# Altium PCB PCB1.PcbDoc
Units mm, origin at the board's own origin, x right, y up, seen from the top; angles counter-clockwise.
Board outline 50 x 25 mm, 2 copper layers (Top Layer, Bottom Layer); 18 components, 15 nets, 57 pads, 8 vias.
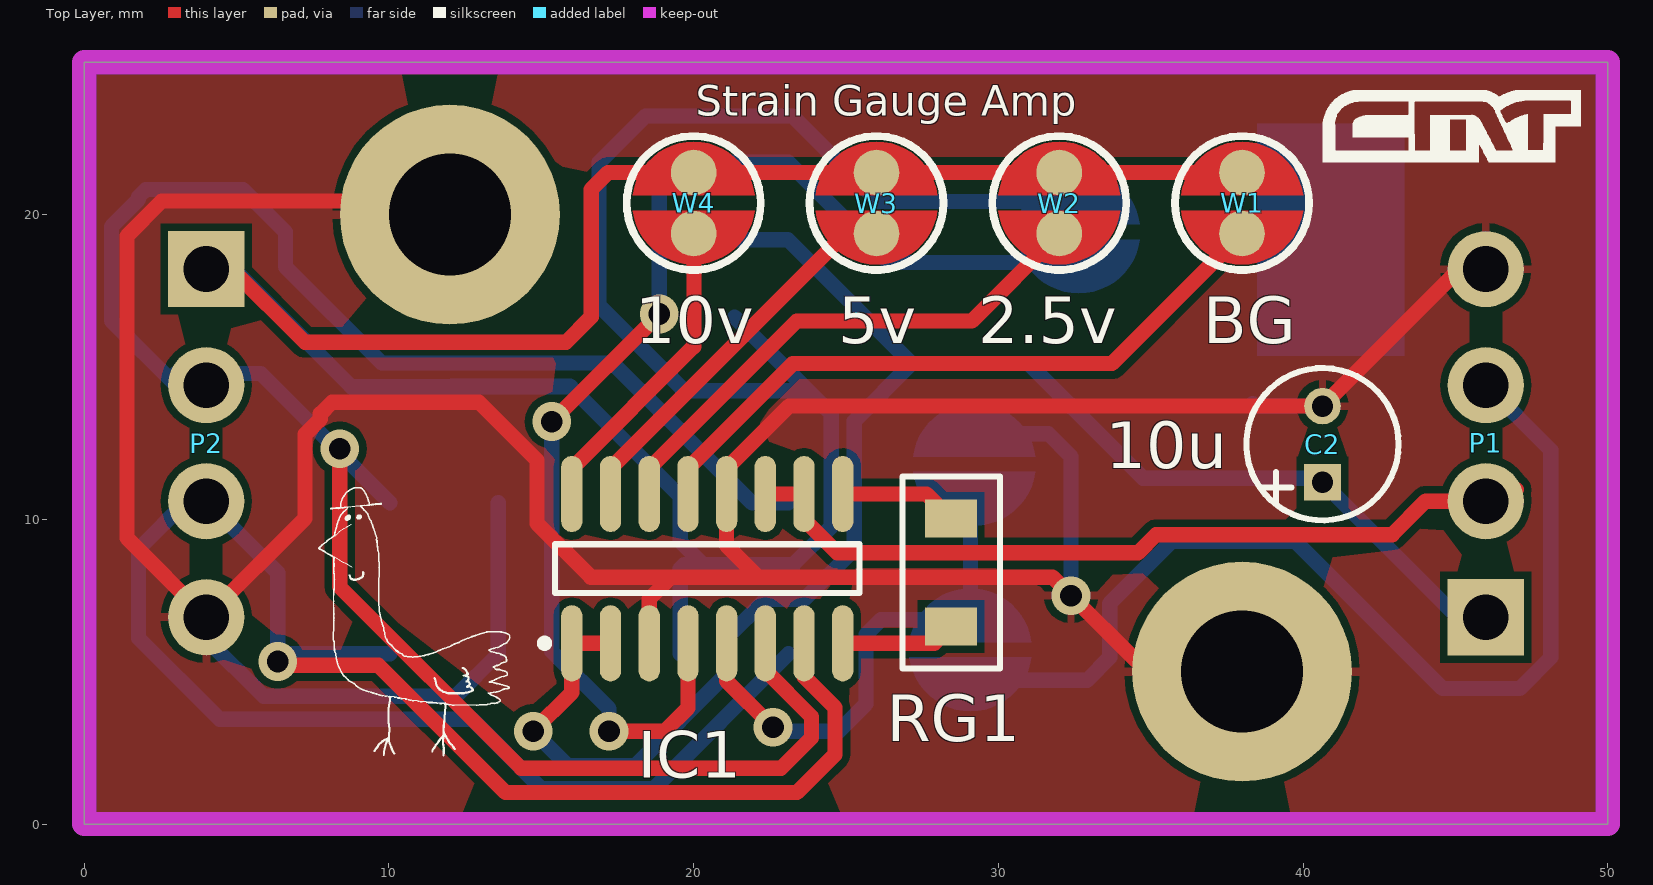
[diagram p0: Top Layer view]
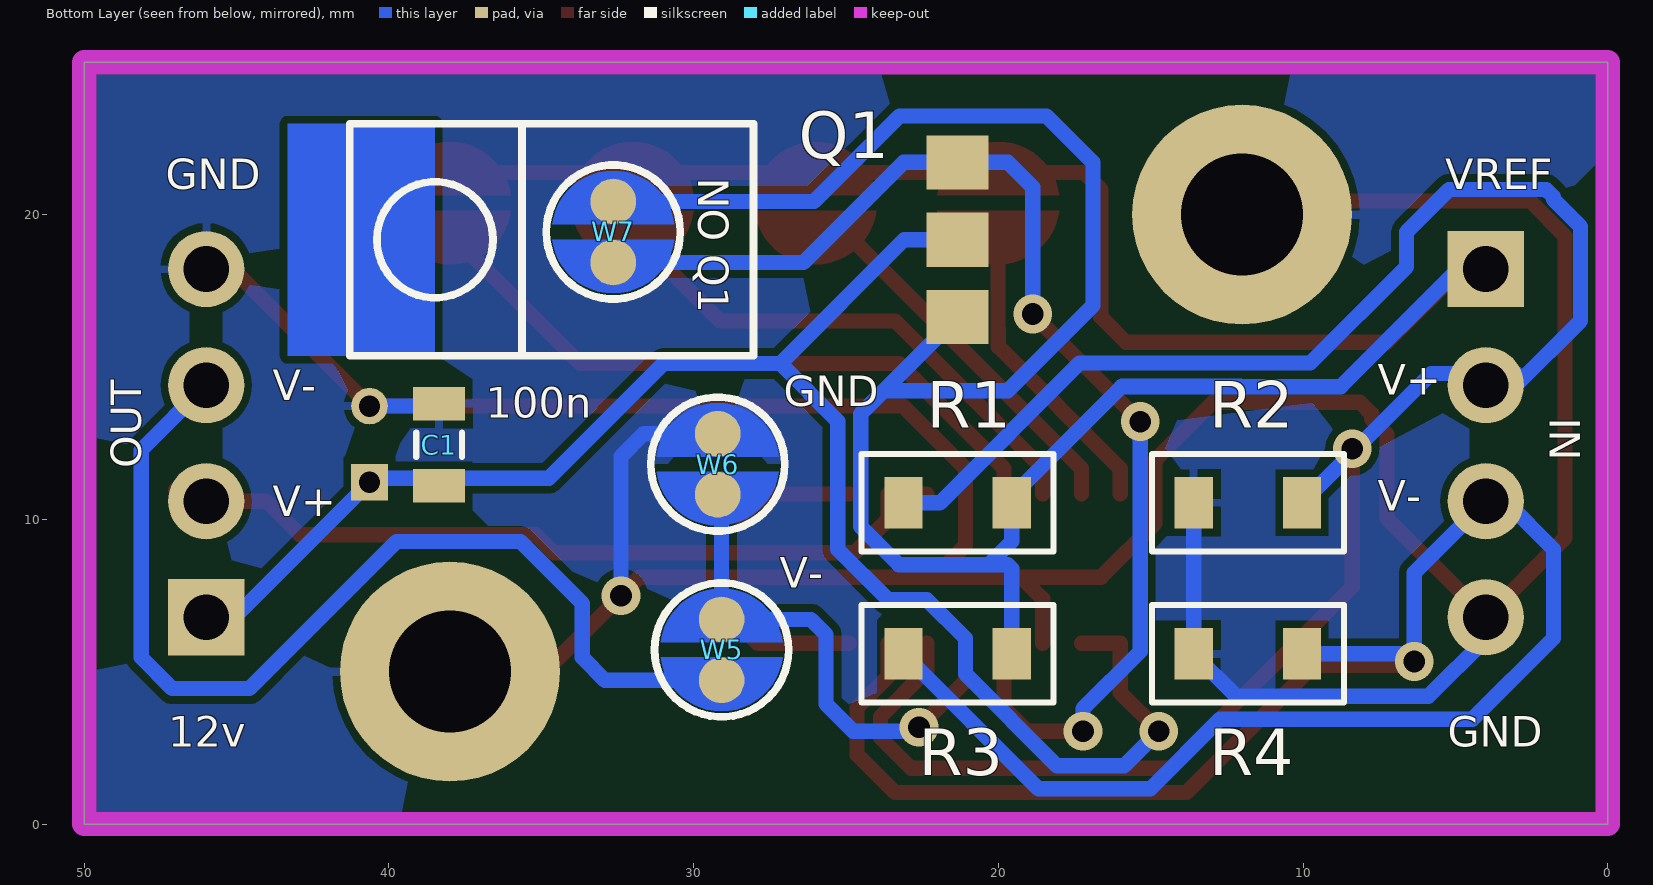
[diagram p1: Bottom Layer view, seen from below]

## Layer stack, top to bottom
Top Solder: solder mask 0.0102, Solder Resist, Dk 3.5
Top Layer: signal copper 0.0356
Dielectric 1: dielectric 0.32, FR-4, Dk 4.8
Bottom Layer: signal copper 0.0356
Bottom Solder: solder mask 0.0102, Solder Resist, Dk 3.5

## Board outline
0,0 0,25 50,25 50,0

## Design rules (kind name [scope] priority, off if disabled: settings)
Clearance "KO Layer" [OnLayer('Keep-Out Layer')] p1: gap=0
Clearance [All] p2: gap=0.254
HoleSize [All] p1: absolutevalues=TRUE maxlimit=1000 minlimit=0.025 maxpercent=80.000 minpercent=20.000
PolygonConnect [All] p1: connectstyle=Relief reliefconductorwidth=0.254 reliefentries=4 polygonreliefangle="90 Angle" airgapwidth=0.254
RoutingVias [All] p1: holewidth=0.711 width=1.27 viastyle="Through Hole" minholewidth=0.711 minwidth=1.27 maxholewidth=0.711 maxwidth=1.27
SolderMaskExpansion [All] p1: expansion=0.102
Width "Silkscreen Width" [(OnLayer('Bottom Overlay') OR OnLayer('Top Overlay'))] p1: maxlimit=1000 minlimit=0.152 preferedwidth=0.254 checkconnectedcopper=TRUE
Width "Min Width" [All] p2: maxlimit=100 minlimit=0.5 preferedwidth=0.5
Width [All] p3: maxlimit=0.254 minlimit=0.254 preferedwidth=0.254
29 further rules are at their usual default settings.

## Components (designator, comment, footprint, x,y, rotation, side; value= is the part's Value field where it differs from the comment)
C1 "100n" C1206 38.354,12.446 r90 bottom
C2 "10u" "Cap 2.5mm" 40.64,13.716 r270 top
IC1 "INA125U" SOIC16_M 20.447,8.382 r90 top
P1 "Output/Power" "Dinkle Mini 4P - NO SILK" 46,12.5 r180 top
P2 "Input/Reference" "Dinkle Mini 4P - NO SILK" 4,12.5 r0 top
Q1 "NPN" "TO220 SMD BENT" 21.336,19.177 r180 bottom
R1 "Res1" R1206 21.336,10.541 r180 bottom
R2 "Res1" R1206 11.811,10.541 r180 bottom
R3 "Res1" R1206 21.336,5.588 r180 bottom
R4 "Res1" R1206 11.811,5.588 r180 bottom
RG1 "Res1" R1206 28.448,8.255 r270 top
W1 "BG" "SMD JUMPER" 38,20.381 r180 top
W2 "2.5v" "SMD JUMPER" 32,20.381 r180 top
W3 "5v" "SMD JUMPER" 26,20.381 r180 top
W4 "10v" "SMD JUMPER" 20,20.381 r180 top
W5 "V-" "SMD JUMPER" 29.083,5.715 r180 bottom
W6 "GND" "SMD JUMPER" 29.21,11.811 r0 bottom
W7 "NO Q1" "SMD Jumper" 32.639,19.431 r180 bottom

## Footprints (in the part's own frame and the unit in brackets; to place one, negate y for a bottom-side part, rotate by r counter-clockwise, add the part's x,y. Pads: shape width x height; smd on the part's side, far side on the other; paste and mask are expansions set on the pad)
C1206 [mm] "Chip Capacitor, Body 3.2x1.6mm, IPC High Density"
  rect 1.1x1.7 smd: 1(-1.35,0) 2(1.35,0)
  silkscreen extent -0.4,-0.75 0.4,0.75, body extent -1.7,-0.9 1.7,0.9, height 1.3
"Cap 2.5mm" [mm]
  rect 1.2x1.2 hole 0.7: 1(2.5,0)
  round 1.2 hole 0.7: 2(0,0)
  silkscreen extent -1.25,-2.5 3.75,2.5, body extent -1.24,-2.49 3.74,2.5, height 8
"Dinkle Mini 4P - NO SILK" [mm]
  rect 2.5x2.5 hole 1.5: 1(0,5.715)
  round 2.5 hole 1.5: 2(0,1.905) 3(0,-1.905) 4(0,-5.715)
  body extent -6.35,-8.2 2.6,8.25, height 7
R1206 [mm]
  rect 1.25x1.7 smd: 1(-1.775,0) 2(1.775,0)
  silkscreen extent -3.15,-1.6 3.15,1.6, body extent -1.91,-0.89 1.91,0.89, height 1
"SMD JUMPER" [mm]
  round 1.5 smd paste+0 mask+0: 1(0,1) 2(0,-1)
  Top Layer region: -2,0.25 -1.656,1.149 -0.935,1.786 0,2.016 0.935,1.786 1.656,1.149 2,0.25 2,0.25
  Top Layer region: 2,-0.25 1.656,-1.149 0.935,-1.786 0,-2.016 -0.935,-1.786 -1.656,-1.149 -2,-0.25 -2,-0.25
  silkscreen extent -2.2,-2.2 2.2,2.2
"SMD Jumper" [mm]
  round 1.5 smd paste+0 mask+0: 1(0,1) 2(0,-1)
  Top Layer region: 2,-0.25 1.656,-1.149 0.935,-1.786 0,-2.016 -0.935,-1.786 -1.656,-1.149 -2,-0.25 -2,-0.25
  Top Layer region: -2,0.25 -1.656,1.149 -0.935,1.786 0,2.016 0.935,1.786 1.656,1.149 2,0.25 2,0.25
  silkscreen extent -2.2,-2.2 2.2,2.2
SOIC16_M [mm] "SOIC, 16-Leads, Body 9.9x3.9mm, Pitch 1.27mm, IPC Low Density"
  oval 2.5x0.7 smd: 1(-2.45,4.445) 2(-2.45,3.175) 3(-2.45,1.905) 4(-2.45,0.635) 5(-2.45,-0.635) 6(-2.45,-1.905) 7(-2.45,-3.175) 8(-2.45,-4.445) 9(2.45,-4.445) 10(2.45,-3.175) 11(2.45,-1.905) 12(2.45,-0.635) 13(2.45,0.635) 14(2.45,1.905) 15(2.45,3.175) 16(2.45,4.445)
  silkscreen extent -2.57,-5 0.8,5.47, body extent -2,-5 2,5, height 1.91
"TO220 SMD BENT" [mil]
  rect 80x70 smd: 1(0,-100) 2(0,0) 3(0,100)
  Top Layer region: -675.43,-150 -866.14,-150 -866.14,150 -675.43,150
  silkscreen extent -785,-150 -264,150, body extent -783,-150 -264,150, height 177

## Part data
C1 C2: library part CAP_1, "Capacitor"
IC1: "<b>Instrumentation Amplifier</b><p> / with Precision Voltage Reference"
P1 P2: library part "Header 4", "Header, 4-Pin"
Q1: "NPN Bipolar Transistor"
R1 R2 R3 R4 RG1: "Resistor"
W1 W2 W3 W4 W5 W6 W7: library part Jumper, "Jumper Wire"

## Free pads (board coordinates)
  round 7.22 hole 4 mask+0: ""(12,20) ""(38,5)

## Via types
v1: diameter 1.27, hole 0.711, Top Layer to Bottom Layer, 8 vias

## Nets (pads, with @x,y where several pads share a name; then routed paths per layer and width w, separated by ;. In a path a pad name is that pad's centre, name@x,y a point inside that pad or via, vN(x,y) a via of type N, cw(c..) or ccw(c..) an arc to the next point about the centre after c; other vN are vias at no path point)
12V: C1.1 C2.1 IC1.1 IC1.2 P1.1 Q1.2 | length 57
  Top Layer w0.5: v1(14.732,3.048) 16.002,4.318 IC1.1 IC1.2
  Bottom Layer w0.5: v1(14.732,3.048) 15.871,1.909 18.07,1.909 21.082,4.921 21.082,6.096 22.352,7.366 23.622,7.366 25.273,9.017 25.273,13.232 27.154,15.113 ; Q1.2 23.09,19.177 27.154,15.113 ; P1.1@47,6.785 P1.1 45.071,6.785 C2.1 40.506,11.35 34.751,11.35 30.988,15.113 27.154,15.113
GND: C1.2 C2.2 IC1.3 IC1.12 P1.4 P2.4 pad. R2.1 R4.1 W6.2 | length 128.3
  Top Layer w0.5: pad.@12,20 11.553,20.447 2.54,20.447 1.397,19.304 1.397,9.388 P2.4 7.243,10.028 7.243,12.791 7.747,13.295 7.747,13.462 8.128,13.843 12.954,13.843 14.859,11.938 14.859,9.867 16.624,8.103 19.253,8.103 ; IC1.3 18.542,7.391 19.253,8.103 ; 22.098,8.128 21.082,9.144 IC1.12 21.082,11.67 23.128,13.716 C2.2 45.139,18.215 P1.4 ; pad.@37,5.381 34.497,5.381 v1(32.385,7.493) 31.775,8.103 19.253,8.103
  Bottom Layer w0.5: P2.4 4,6.073 5.878,4.195 12.193,4.195 R4.1 R2.1 ; W6.2 31.639,12.811 32.385,12.065 v1(32.385,7.493) ; C1.2 38.434,13.716 C2.2
NetIC1_4: IC1.4 Q1.3 W7.2 | length 40.7
  Top Layer w0.5: v1(15.342,13.208) v1(18.872,16.739) ; v1(17.221,3.048) 19.05,3.048 19.812,3.81 IC1.4
  Bottom Layer w0.5: v1(15.342,13.208) 15.342,5.664 17.221,3.785 v1(17.221,3.048) ; v1@18.974,16.637 v1(18.872,16.739) 18.872,20.904 19.685,21.717 23.114,21.717 26.4,18.431 W7.2
NetIC1_5: IC1.5 W5.1 W6.1 | length 16.7
  Top Layer w0.5: IC1.5 21.082,4.699 v1(22.606,3.175)
  Bottom Layer w0.5: v1(22.606,3.175) 22.733,3.048 24.765,3.048 25.654,3.937 25.654,6.223 26.146,6.715 W5.1 W6.1@29.083,10.668
NetIC1_8: IC1.8 RG1.2 | length 3.8
  Top Layer w0.5: IC1.8 27.9,5.932 RG1.2
NetIC1_9: IC1.9 RG1.1 | length 3.9
  Top Layer w0.5: IC1.9 27.646,10.832 RG1.1
NetIC1_13: IC1.13 W1.1 | length 22.2
  Top Layer w0.5: IC1.13 19.812,11.67 23.255,15.113 33.732,15.113 W1.1
NetIC1_14: IC1.14 W2.1 | length 17.5
  Top Layer w0.5: IC1.14 18.542,11.67 23.382,16.51 29.129,16.51 W2.1
NetIC1_15: IC1.15 W3.1 | length 11.7
  Top Layer w0.5: IC1.15 17.272,11.67 24.983,19.381
NetIC1_16: IC1.16 W4.1 | length 10.2
  Top Layer w0.5: IC1.16 16.002,11.67 20,15.668 20,16.256 20.011,16.267 20.011,19.37 W4.1
VIN+: IC1.6 P2.2 R1.1 R2.2 | length 69.2
  Top Layer w0.5: v1(8.382,12.319) 8.382,7.787 14.34,1.829 22.871,1.829 23.872,2.83 23.872,3.52 22.352,5.04 IC1.6
  Bottom Layer w0.5: P2.2@3,14.405 0.889,16.516 0.889,19.612 1.778,20.501 1.778,20.587 2.019,20.828 5.207,20.828 6.604,19.431 6.604,18.288 9.762,15.13 17.331,15.13 21.921,10.541 R1.1 ; P2.2@3,14.786 5.791,14.786 R2.2
VIN-: IC1.7 P2.3 R3.1 R4.2 | length 65.3
  Top Layer w0.5: v1(6.35,5.334) 6.477,5.207 9.652,5.207 13.827,1.032 23.394,1.032 24.638,2.276 24.638,3.82 23.622,4.836 IC1.7
  Bottom Layer w0.5: v1(6.35,5.334) 6.35,8.245 P2.3 3.356,10.595 1.778,9.017 1.778,6.096 4.433,3.441 12.728,3.441 15.014,1.155 18.678,1.155 R3.1 ; v1@6.604,5.588 R4.2
VOUT+: IC1.10 IC1.11 P1.2 | length 26.9
  Top Layer w0.5: IC1.11 IC1.10 23.622,9.994 24.715,8.901 34.585,8.901 35.179,9.495 42.926,9.495 44.026,10.595 P1.2@47,10.595 ; P1.2@46.81,10.786 P1.2@47,10.976
VOUT-: P1.3 W5.2 | length 34.2
  Bottom Layer w0.5: W5.2 32.909,4.715 33.655,5.461 33.655,7.239 35.687,9.271 39.751,9.271 44.577,4.445 47.117,4.445 48.133,5.461 48.133,12.272 P1.3
VREF: P2.1 Q1.1 R1.2 R3.2 W1.2 W2.2 W3.2 W4.2 W7.1 | length 113.7
  Top Layer w0.5: P2.1@3,18.215 4.835,18.215 7.239,15.811 15.811,15.811 16.637,16.637 16.637,20.828 17.19,21.381 W4.2 W3.2 W2.2 W1.2
  Bottom Layer w0.5: P2.1@3,18.215 4.899,18.215 8.763,14.351 15.964,14.351 ; 12.065,14.376 15.939,14.376 15.964,14.351 ; R3.2 19.561,8.382 19.688,8.509 20.32,8.509 ; Q1.1 23.749,14.224 ; W7.1 26.051,20.431 23.241,23.241 18.415,23.241 16.891,21.717 16.891,17.018 19.685,14.224 23.749,14.224 ; 15.964,14.351 19.561,10.754 R1.2 19.561,9.268 20.32,8.509 ; 20.32,8.509 23.267,8.509 24.519,9.761 24.519,13.454 23.749,14.224

## Polygon pours and split planes (outlines as drawn)
GND on Bottom Layer "Top Layer-No Net" (solid, remove dead copper, pour order 4): 0,0 0,25 50,25 50,0
GND on Top Layer "Top Layer-No Net" (solid, remove dead copper, pour order 2): -0.254,0 0,0.254 0,25 50,25 50,0

## Keep-outs
Keep-Out Layer:
  the board outline again, w0.8

## Silkscreen, mask and mechanical layers (free items; w line width, h text height)
Top Overlay:
  drawing of 6 lines, arcs and shapes, not listed
  text "Strain Gauge Amp" at 20.066,23.241 h1
Bottom Overlay:
  text "VREF" at 5.333,20.828 h1
  text "GND" at 47.333,20.828 h1
  text "V+" at 7.549,14.097 h1
  text "V-" at 43.815,13.905 h1
  text "IN" at 1.905,13.335 h1 r90
  text "OUT" at 48.133,11.684 h1 r270
  text "V-" at 7.549,10.287 h1
  text "V+" at 43.815,10.095 h1
  text "GND" at 5.25,2.54 h1
  text "12v" at 47.25,2.54 h1